# Altium PCB GT_4SBalancer.PcbDoc
Units mm, origin at the board's own origin, x right, y up, seen from the top; angles counter-clockwise.
Board outline 65.15 x 30.1 mm, 2 copper layers (Top Layer, Bottom Layer); 31 components, 25 nets, 99 pads, 31 vias.
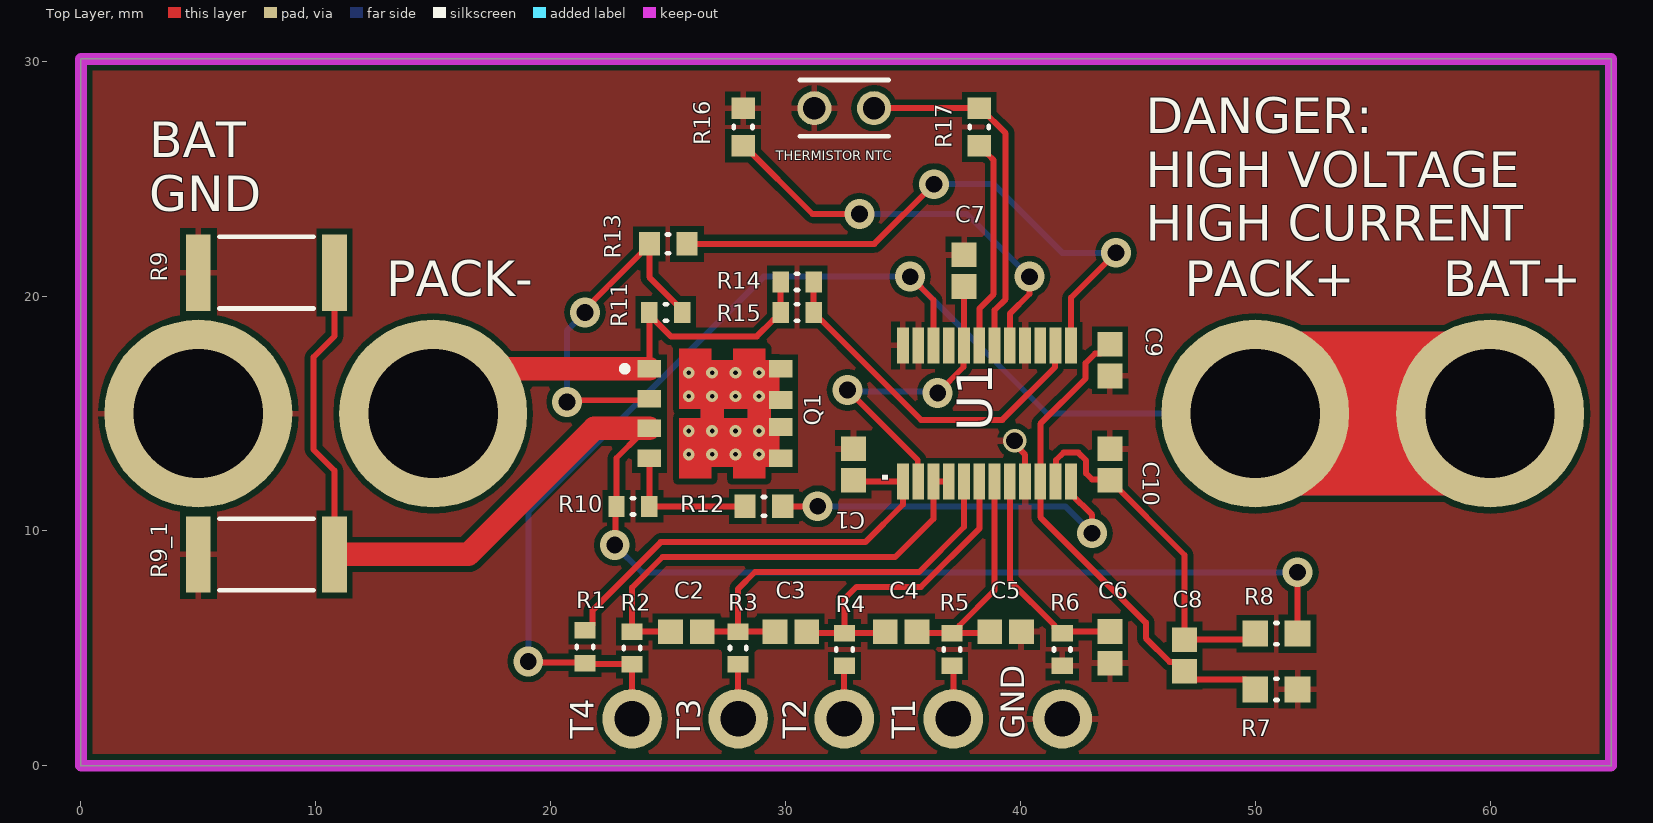
[diagram p0: Top Layer view]
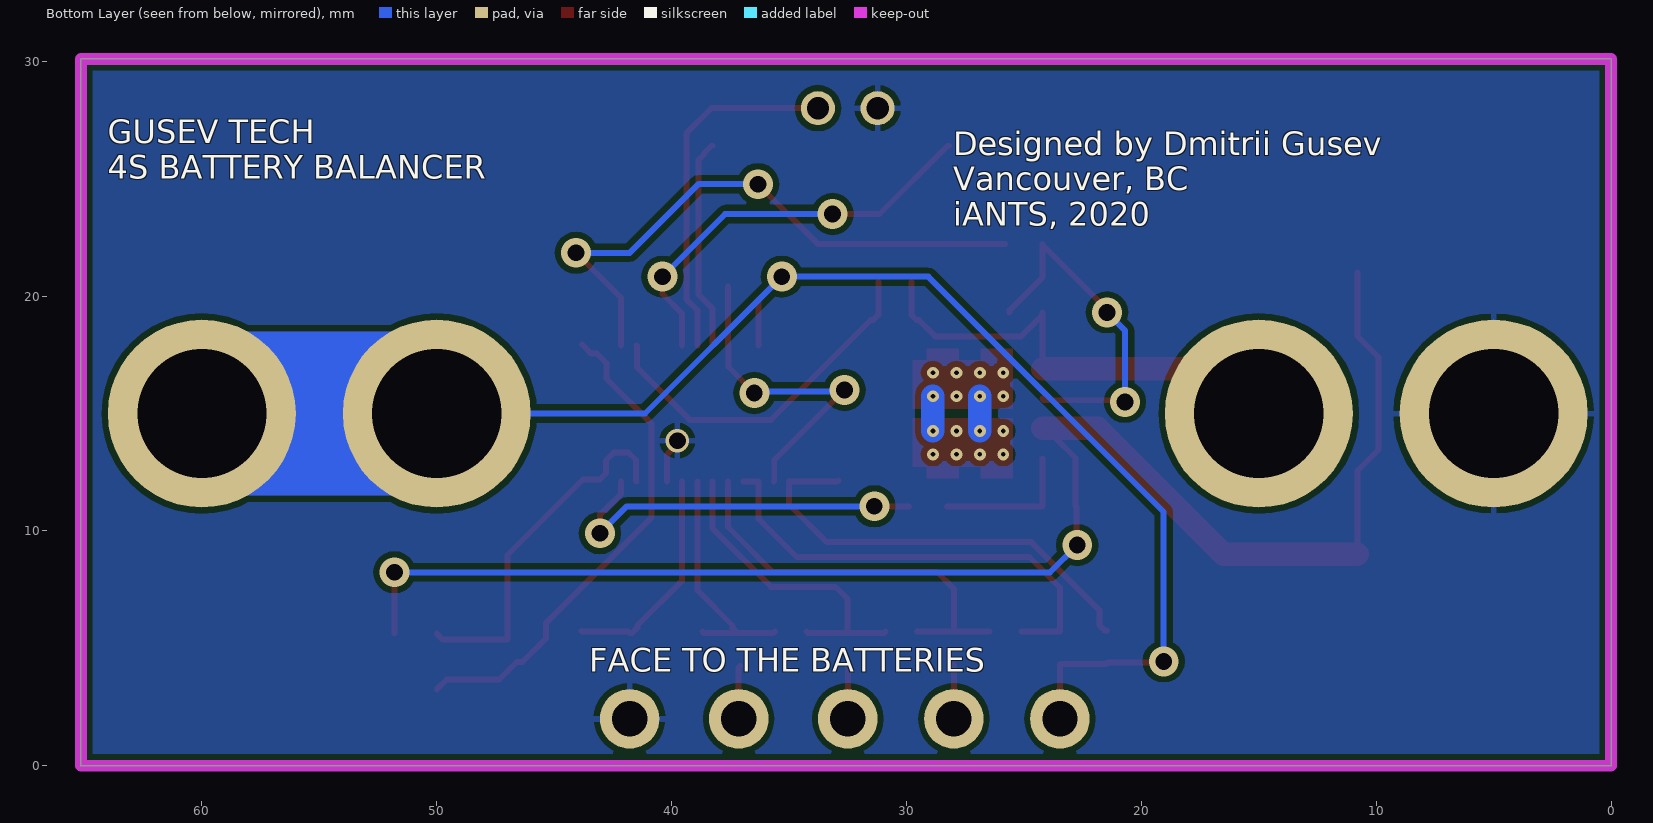
[diagram p1: Bottom Layer view, seen from below]

## Layer stack, top to bottom
Top Solder: solder mask 0.0102, Solder Resist, Dk 3.5
Top Layer: signal copper 0.0356
Dielectric 1: dielectric 0.32, FR-4, Dk 4.8
Bottom Layer: signal copper 0.0356
Bottom Solder: solder mask 0.0102, Solder Resist, Dk 3.5

## Board outline
0,0 65.151,0 65.151,30.099 0,30.099

## Design rules (kind name [scope] priority, off if disabled: settings)
Clearance [All] p1: gap=0.254 ignorepadtopadclearanceinfootprint=FALSE except(0: Arc-Hole Track-Hole SMDPad-Hole THPad-Hole Via-Hole Fill-Hole Poly-Hole Region-Hole Text-Hole)
PolygonConnect [All] p1: connectstyle=Relief reliefconductorwidth=0.254 reliefentries=4 polygonreliefangle="90 Angle" airgapwidth=0.254
RoutingVias [All] p1: holewidth=0.711 width=1.27 viastyle="Through Hole" minholewidth=0.711 minwidth=1.27 maxholewidth=0.711 maxwidth=1.27
SolderMaskExpansion [All] p1: expansion=0.102
Width [All] p1: maxlimit=0.254 minlimit=0.254 preferedwidth=0.254
30 further rules are at their usual default settings.

## Components (designator, comment, footprint, x,y, rotation, side; value= is the part's Value field where it differs from the comment)
C1 "UMK107BJ105KA-T" CAPC1608X90X35ML10T25 32.893,12.827 r270 top
C2 "CC0603KRX7R7BB104" CAPC1608X90X40ML10T20 25.781,5.715 r180 top
C3 "CC0603KRX7R7BB104" CAPC1608X90X40ML10T20 30.226,5.715 r180 top
C4 "CC0603KRX7R7BB104" CAPC1608X90X40ML10T20 34.925,5.715 r180 top
C5 "CC0603KRX7R7BB104" CAPC1608X90X40ML10T20 39.37,5.715 r180 top
C6 "CC0603KRX7R7BB104" CAPC1608X90X40ML10T20 43.815,5.043 r270 top
C7 "UMK107BJ105KA-T" CAPC1608X90X35ML10T25 37.6,21.082 r270 top
C8 "CC0603KRX7R7BB104" CAPC1608X90X40ML10T20 46.99,4.699 r270 top
C9 "CC0603KRX7R7BB104" CAPC1608X90X40ML10T20 43.815,17.272 r90 top
C10 "CC0603KRX7R7BB104" CAPC1608X90X40ML10T20 43.815,12.827 r270 top
Q1 "NVMFD5489NLWFT3G" ONSC-DFN-8-506BT_V 27,15 r0 top
R1 "1K 5% 0603(1608)" RESC0603(1608)_L 21.463,5.068 r90 top value="1000.00 Ohm"
R2 "1K 5% 0603(1608)" RESC0603(1608)_L 23.468,5.018 r90 top value="1000.00 Ohm"
R3 "1K 5% 0603(1608)" RESC0603(1608)_L 27.984,5.018 r90 top value="1000.00 Ohm"
R4 "1K 5% 0603(1608)" RESC0603(1608)_L 32.512,4.953 r90 top value="1000.00 Ohm"
R5 "1K 5% 0603(1608)" RESC0603(1608)_L 37.084,4.953 r90 top value="1000.00 Ohm"
R6 "1K 5% 0603(1608)" RESC0603(1608)_L 41.783,4.953 r90 top value="1000.00 Ohm"
R7 "100R 1% 0603(1608)" RESC0603(1608)_M 50.9,3.255 r180 top value="100.00 Ohm"
R8 "100R 1% 0603(1608)" RESC0603(1608)_M 50.9,5.628 r180 top value="100.00 Ohm"
R9 "R008 1% 2512(6432)" RESC2512(6432)_L 7.9,21 r0 top value="30100.00 Ohm"
R9_1 "R008 1% 2512(6432)" RESC2512(6432)_L 7.9,9 r0 top value="30100.00 Ohm"
R10 "1M 1% 0603(1608)" RESC0603(1608)_L 23.505,11.049 r0 top value="1000000.00 Ohm"
R11 "1M 1% 0603(1608)" RESC0603(1608)_L 24.905,19.304 r0 top value="1000000.00 Ohm"
R12 "10K 1% 0603(1608)" RESC0603(1608)_N 29.083,11.049 r0 top value="10000.00 Ohm"
R13 "10K 1% 0603(1608)" RESC0603(1608)_N 25.005,22.225 r0 top value="10000.00 Ohm"
R14 "1M 1% 0603(1608)" RESC0603(1608)_L 30.495,20.607 r0 top value="1000000.00 Ohm"
R15 "1M 1% 0603(1608)" RESC0603(1608)_L 30.495,19.304 r0 top value="1000000.00 Ohm"
R16 "100K 1% 0603(1608)" RESC0603(1608)_N 28.194,27.2 r90 top value="100000.00 Ohm"
R17 "10K 1% 0603(1608)" RESC0603(1608)_N 38.25,27.2 r270 top value="10000.00 Ohm"
"THERMISTOR NTC" "103AT-2" SEMI-103AT-2_V 32.5,28 r0 top
U1 "BQ77915" BQ77915 35,15 r90 top

## Footprints (in the part's own frame and the unit in brackets; to place one, negate y for a bottom-side part, rotate by r counter-clockwise, add the part's x,y. Pads: shape width x height; smd on the part's side, far side on the other; paste and mask are expansions set on the pad)
BQ77915 [mm] "TSSOP-24"
  rect 1.524x0.5 smd: 1(-2.9,0) 2(-2.9,-0.65) 3(-2.9,-1.3) 4(-2.9,-1.95) 5(-2.9,-2.6) 6(-2.9,-3.25) 7(-2.9,-3.9) 8(-2.9,-4.55) 9(-2.9,-5.2) 10(-2.9,-5.85) 11(-2.9,-6.5) 12(-2.9,-7.15) 13(2.9,-7.15) 14(2.9,-6.5) 15(2.9,-5.85) 16(2.9,-5.2) 17(2.9,-4.55) 18(2.9,-3.9) 19(2.9,-3.25) 20(2.9,-2.6) 21(2.9,-1.95) 22(2.9,-1.3) 23(2.9,-0.65) 24(2.9,0)
  body extent -3.21,-7.41 3.22,0.29, height 1.11
CAPC1608X90X35ML10T25 [mm] "Chip Capacitor, 2-Leads, Body 1.70x0.90mm, IPC Low Density"
  rect 1.05x1.05 smd: 1(-0.675,0) 2(0.675,0)
  body extent -0.85,-0.45 0.85,0.45, height 0.9
CAPC1608X90X40ML10T20 [mm] "Chip Capacitor, 2-Leads, Body 1.7x0.9mm, IPC Low Density"
  rect 1.05x1.05 smd: 1(-0.675,0) 2(0.675,0)
  body extent -0.85,-0.45 0.85,0.45, height 0.9
ONSC-DFN-8-506BT_V [mm] "DFN, 8-Leads, Body 5.9x4.9mm, Pitch 1.27mm"
  rect 1x0.75 smd: 1(-2.795,1.905) 2(-2.795,0.635) 3(-2.795,-0.635) 4(-2.795,-1.905) 5(2.795,-1.905) 6(2.795,-0.575) 7(2.795,0.575) 8(2.795,1.905)
  Top Layer region: -1.545,-0.2 -1.545,-2.28 2.735,-2.28 2.735,-0.2
  Top Layer region: 0.755,-0.2 0.755,-2.775 2.155,-2.775 2.155,-0.2
  Top Layer region: -1.545,-0.2 -1.545,-2.775 -0.145,-2.775 -0.145,-0.2
  Top Layer region: -0.145,0.2 -0.145,2.775 -1.545,2.775 -1.545,0.2
  Top Layer region: 2.155,0.2 2.155,2.775 0.755,2.775 0.755,0.2
  Top Layer region: 2.735,0.2 2.735,2.28 -1.545,2.28 -1.545,0.2
  silkscreen extent -3.97,1.78 -3.72,2.03, body extent -2.95,-2.45 2.95,2.45, height 1.1
RESC0603(1608)_L [mm] "Chip Resistor, Body 1.6x0.8mm, IPC High Density"
  rect 0.7x0.9 smd: 1(-0.7,0) 2(0.7,0)
  silkscreen extent -0.05,-0.35 0.05,0.35, body extent -0.85,-0.47 0.85,0.47, height 0.6
RESC0603(1608)_M [mm] "Chip Resistor, Body 1.6x0.8mm, IPC Low Density"
  rect 1.1x1.1 smd: 1(-0.9,0) 2(0.9,0)
  silkscreen extent -0.05,-0.45 0.05,0.45, body extent -0.85,-0.47 0.85,0.47, height 0.6
RESC0603(1608)_N [mm] "Chip Resistor, Body 1.6x0.8mm, IPC Medium Density"
  rect 0.9x1 smd: 1(-0.8,0) 2(0.8,0)
  silkscreen extent -0.05,-0.4 0.05,0.4, body extent -0.85,-0.47 0.85,0.47, height 0.6
RESC2512(6432)_L [mm] "Chip Resistor, Body 6.4x3.2mm, IPC High Density"
  rect 1.05x3.25 smd: 1(-2.9,0) 2(2.9,0)
  silkscreen extent -2,-1.52 2,1.53, body extent -3.25,-1.7 3.25,1.7, height 0.75
SEMI-103AT-2_V [mm] "THD, 2-Leads, Body Width 3.8mm (Max), Pitch 2.54mm"
  round 1.45 hole 0.95: 1(-1.27,0) 2(1.27,0)
  silkscreen extent -1.9,-1.2 1.9,1.2, body extent -1.9,-1.2 1.9,1.2, height 9.5

## Part data
C1 C7: library part CMP-2000-05447-1, "Chip Capacitor, 1 uF, +/- 10%, 50 V, -55 to 85 degC, 0603 (1608 Metric), RoHS, Tape and Reel", Capacitance=1µF, Manufacturer="Taiyo Yuden", Operating Temperature=-55degC~85degC, Package / Case=0603(1608Metric), Package Description="2-Pin Surface Mount Device, Body 1.6 x 0.8 mm", Package Reference=603, Ratings=-, Standard Package=1, Temperature Coefficient=X5R, Tolerance=±10%, Voltage - Rated=50V, Applications=GeneralPurpose, Catalog Drawings=xMKSeries_0603_0.8, Category=Capacitors, Datasheet URL=https://datasheet.ciiva.com/15922/336umk107bj105ka-t-15922611.pdf, Datasheet Version=Mar-13, Family=CeramicCapacitors, Features=-, Height - Seated (Max)=-, Lead Spacing=-, Lead Style=-, Manufacturer URL=http://www.t-yuden.com/, Mounting Type=SurfaceMount,MLCC, Online Catalog=MSeries, Other Names=587-2400-6, Packaging=Digi-Reel, Series=M
C2 C3 C4 C5 C6 C8 C9 C10: library part CMP-2000-05002-1, "Ceramic Multilayer Capacitor, 100 nF, +/- 10%, 50 V, -55 to 155 degC, 0603 (1608 Metric), RoHS, Tape and Reel", Capacitance=0.1µF, Manufacturer=Yageo, Operating Temperature=-55degC~125degC, Package / Case=0603(1608Metric), Package Description="2-Pin Surface Mount Device, Body 1.6 x 0.8 mm", Package Reference=603, Ratings=-, Standard Package=1, Temperature Coefficient=X7R, Tolerance=±10%, Voltage - Rated=16V, Applications=GeneralPurpose, Category=Capacitors, Datasheet URL=https://datasheet.ciiva.com/11786/0900766b80d84f1d-11786077.pdf, Datasheet Version="Rev. 2, 05/2009", Family=CeramicCapacitors, Featured Product=CommodityMultilayerCeramicCapacitors–CCSeries, Features=-, Height - Seated (Max)=-, Lead Spacing=-, Lead Style=-, Manufacturer URL=http://www.yageo.com/, Mounting Type=SurfaceMount,MLCC, Online Catalog=CCSeries, Other Names=311-1088-6, Packaging=Digi-Reel, Product Training Modules=MultilayerCeramicCapacitors, Series=CC
Q1: library part CMP-1058-00276-1, "Power MOSFET, 60 V, 12 A, 65 mOhm, Dual N-Channel Logic Level, 8-Pin DFN, Pb-Free, Tape and Reel", Manufacturer="On Semiconductor", Package Type=DFN-8, Channel Polarity="N Channel", Ciss Typ (pF)=330, ComponentLink1Description="Manufacturer URL", ComponentLink1URL=http://www.onsemi.com/, ComponentLink2Description=Datasheet, ComponentLink2URL=http://www.onsemi.com/pub_link/Collateral/NVMFD5489NL-D.PDF, ComponentLink3Description="Package Specification", ComponentLink3URL=http://www.onsemi.com/pub_link/Collateral/506BT.PDF, Configuration=Dual, Coss Typ (pF)=80, Crss Typ (pF)=39, DatasheetVersion="Rev. 1", ID Max (A)=12, Mounting Technology="Surface Mount", PackageDescription="8-Pin Small Outline No-Lead, Body 4.9 x 5.9 mm, Pitch 1.27 mm", PackageReference=DFN-8-506BT, PackageVersion="Rev. E, 02/2013", Packing="Tape and Reel", PartId=1, PartNumber=NVMFD5489NLWFT3G, Qrr Typ (nC)=26.5, RoHS=Pb-Free, V(BR)DSS Min (V)=60, VGS(th) Max (V)=2.5, VGS Max (V)=20
R1 R2 R3 R4 R5 R6: library part CMP-1012-00074-1, "1K 0.1W 5% 0603 (1608 Metric)  SMD", Case-EIA=0603, Case-Metric=1608, Power="0.1 W", Tolerance="5 %", Technology=SMT
R7 R8: library part CMP-1012-00397-1, "100R 0.1W 1% 0603 (1608 Metric)  SMD", Case-EIA=0603, Case-Metric=1608, Power="0.1 W", Tolerance="1 %", Technology=SMT
R9 R9_1: library part CMP-1018-00676-1, "30K1 1W 1% 2512 (6432 Metric)  SMD", Case-EIA=2512, Case-Metric=6432, Power="1 W", Tolerance="1 %", Technology=SMT
R10 R11 R14 R15: library part CMP-1012-00849-1, "1M 0.1W 1% 0603 (1608 Metric)  SMD", Case-EIA=0603, Case-Metric=1608, Power="0.1 W", Tolerance="1 %", Technology=SMT
R12 R13 R17: library part CMP-1012-00623-1, "10K 0.1W 1% 0603 (1608 Metric)  SMD", Case-EIA=0603, Case-Metric=1608, Power="0.1 W", Tolerance="1 %", Technology=SMT
R16: library part CMP-1012-00736-1, "100K 0.1W 1% 0603 (1608 Metric)  SMD", Case-EIA=0603, Case-Metric=1608, Power="0.1 W", Tolerance="1 %", Technology=SMT
"THERMISTOR NTC": library part CMP-2000-05824-1, "Precision NTC Thermistor, 10 kOhm, +/- 1%, 10 mW, -50 to 110 degC, 2-Pin THD, RoHS, Bulk", Manufacturer=Semitec, Operating Temperature Range=-50Cto+110C, Package Description="2-Pin Through Hole Device, Body Width 3.8 mm (Max), Pitch 2.54 mm", Resistance=10kOhms, Tolerance=1%, Brand=Semitec, Datasheet URL=https://www.rapidonline.com/pdf/61-0500e.pdf, Datasheet Version="Rev. A, 02/2007", Height=2.4mm, Lead Spacing=2.54mm, Length=17mm, Manufacturer URL=http://www.semitec.co.jp/english/, Mounting Technology=ThroughHole, Package Reference=103AT-2, Packaging=Bulk, Product Category=Thermistors-NTC, RoHS=True, Series=AT, Termination Style=Radial, Type=NTC, Width=3.7mm

## Free pads (board coordinates)
  round 8 hole 5.5: 14(5,15) 14(15,15) 14(50,15) 14(60,15)
  round 2.54 hole 1.5: 15(23.468,2) 15(27.984,2) 15(32.5,2) 15(37.143,2) 15(41.786,2)

## Via types
v1: diameter 0.5, hole 0.2, Top Layer to Bottom Layer, 16 vias
v2: diameter 1.27, hole 0.711, Top Layer to Bottom Layer, 14 vias
v3: diameter 1, hole 0.711, Top Layer to Bottom Layer, 1 vias

## Nets (pads, with @x,y where several pads share a name; then routed paths per layer and width w, separated by ;. In a path a pad name is that pad's centre, name@x,y a point inside that pad or via, vN(x,y) a via of type N, cw(c..) or ccw(c..) an arc to the next point about the centre after c; other vN are vias at no path point)
GND: "THERMISTOR NTC.1" C1.1 C5.1 C6.2 C7.1 C9.1 C10.1 pad.14@5,15 pad.15@41.786,2 R6.1 R7.1 R9.1 R9_1.1 R16.2 U1.9 U1.16 U1.23 U1.24 | length 1.9
  Top Layer w0.254: v3(39.751,13.843) 39.751,13.692 40.2,13.243 U1.9
NetC1_2: C1.2 R1.2 U1.1 | length 19.2
  Top Layer w0.254: R1.2 21.563,5.768 21.786,5.991 21.786,6.629 24.682,9.525 33.401,9.525 35,11.124 U1.1 32.945,12.1 C1.2
NetC2_1: C2.1 C3.2 R3.2 U1.5 | length 17.6
  Top Layer w0.254: C2.1 26.459,5.718 R3.2 ; C3.2 29.548,5.718 R3.2 ; U1.5 37.6,10.168 35.687,8.255 28.702,8.255 27.984,7.537 R3.2
NetC2_2: C2.2 R2.2 U1.3 U1.4 | length 19.8
  Top Layer w0.254: C2.2 25.103,5.718 R2.2 23.468,7.593 24.765,8.89 34.671,8.89 36.3,10.519 U1.3 U1.4
NetC3_1: C3.1 C4.2 R4.2 U1.6 | length 13.8
  Top Layer w0.254: C3.1 30.963,5.653 R4.2 ; C4.2 34.188,5.653 R4.2 ; U1.6 38.25,10.1 35.77,7.62 33.02,7.62 32.512,7.112 R4.2
NetC4_1: C4.1 C5.2 R5.2 U1.7 | length 10.3
  Top Layer w0.254: C4.1 35.662,5.653 R5.2 R5.2@37.184,5.653 ; C5.2 38.633,5.653 R5.2@37.184,5.653 ; U1.7 38.9,7.469 37.407,5.976 37.407,5.876 R5.2@37.184,5.653
NetC6_1: C6.1 R6.2 U1.8 | length 9.5
  Top Layer w0.254: U1.8 39.55,7.886 41.46,5.976 41.46,5.876 41.683,5.653 R6.2 41.848,5.718 C6.1 C6.1@43.84,5.743
NetC7_2: C7.2 U1.2 U1.20 | length 14
  Top Layer w0.254: v2(32.639,16.002) 32.649,16.002 35.631,13.02 35.631,12.119 U1.2 ; v2(36.476,15.875) 37.581,16.98 37.581,17.881 U1.20 C7.2
  Bottom Layer w0.254: v2(32.639,16.002) 32.703,15.938 36.412,15.938 v2(36.476,15.875)
NetC8_1: C8.1 C10.2 R8.2 U1.11 | length 15.4
  Top Layer w0.254: U1.11 41.519,12.119 41.519,13.02 41.834,13.335 42.466,13.335 42.799,13.002 42.799,12.446 43.053,12.192 43.775,12.192 C10.2 46.99,8.977 C8.1 49.746,5.374 R8.2
NetC8_2: C8.2 C9.2 R7.2 U1.10 | length 21.3
  Top Layer w0.254: C9.2 43.417,17.549 43.178,17.549 42.781,17.152 42.781,16.492 40.85,14.561 U1.10 40.85,10.585 45.339,6.096 45.339,5.436 46.353,4.422 46.592,4.422 C8.2 47.336,3.678 49.577,3.678 R7.2
NetQ1_1: pad.14@15,15 Q1.1 R11.1 R14.1 R15.1 | length 20.1
  Top Layer w0.254: Q1.1 R11.1@24.205,19.204 ; R11.1 R11.1@24.205,19.204 ; R14.1 R15.1 29.795,19.204 29.572,18.981 29.472,18.981 28.779,18.288 25.121,18.288 R11.1@24.205,19.204
  Top Layer w1: pad.14@15,15 16.905,16.905 Q1.1
NetQ1_2: Q1.2 R11.2 R13.1 | length 15.2
  Top Layer w0.254: v2(20.701,15.494) 20.772,15.565 24.134,15.565 Q1.2 ; v2(21.463,19.304) 21.463,19.433 R13.1@24.205,22.175 ; R13.1 R13.1@24.205,22.175 ; R11.2 25.605,19.404 24.205,20.804 R13.1@24.205,22.175
  Bottom Layer w0.254: v2(20.701,15.494) 20.701,18.542 v2(21.463,19.304)
NetQ1_3: Q1.3 R8.1 R9.2 R9_1.2 R10.1 | length 66.2
  Top Layer w0.254: R9_1.2 10.8,12.568 9.906,13.462 9.906,17.399 10.8,18.293 R9.2 ; v2(22.733,9.398) 22.769,9.434 22.769,11.013 R10.1 22.805,13.109 23.813,14.117 23.957,14.117 Q1.3 ; R8.1 v2(51.8,8.239) v2@51.816,8.255
  Top Layer w1: R9_1.2 16.493,9 21.858,14.365 Q1.3
  Bottom Layer w0.254: v2(22.733,9.398) 23.892,8.239 v2(51.8,8.239)
NetQ1_4: Q1.4 R10.2 R12.1 | length 6.1
  Top Layer w0.254: Q1.4 R10.2 R12.1
NetQ1_5: Q1.5 Q1.6 Q1.7 Q1.8 | length 6
  Top Layer w0.254: v1(25.875,15.74) 25.9,15.74 v1@25.908,15.748
  Top Layer w1: v1(26.875,14.26) v1(26.875,15.74) ; v1(28.875,14.26) v1(28.875,15.74)
  Bottom Layer w1: v1(26.875,14.26) v1(26.875,15.74) ; v1(28.875,14.26) v1(28.875,15.74)
  other v1: 25.875,13.26 26.875,13.26 27.875,13.26 28.875,13.26 25.875,14.26 27.875,14.26 27.875,15.74 25.875,16.74 26.875,16.74 27.875,16.74 28.875,16.74
NetR1_1: pad.14@50,15 pad.14@60,15 pad.15@23.468,2 R1.1 R2.1 U1.22 | length 74
  Top Layer w0.254: v2(19.05,4.445) 19.088,4.407 21.424,4.407 R1.1 21.488,4.343 23.443,4.343 R2.1 pad.15@23.468,2 ; v2(35.306,20.828) 36.3,19.834 U1.22
  Top Layer w7: pad.14@50,15 pad.14@60,15
  Bottom Layer w0.254: v2(19.05,4.445) 19.05,10.807 29.071,20.828 v2(35.306,20.828) 41.134,15 pad.14@50,15
  Bottom Layer w7: pad.14@50,15 pad.14@60,15
NetR3_1: pad.15@27.984,2 R3.1 | length 2.3
  Top Layer w0.254: pad.15@27.984,2 R3.1
NetR4_1: pad.15@32.5,2 R4.1 | length 2.3
  Top Layer w0.254: pad.15@32.5,2 32.5,4.241 R4.1
NetR5_1: pad.15@37.143,2 R5.1 | length 2.3
  Top Layer w0.254: R5.1 37.143,4.194 pad.15@37.143,2
NetR12_2: R12.2 U1.12 | length 16.2
  Top Layer w0.254: R12.2 v2(31.369,11.049) ; U1.12 42.15,11.588 43.053,10.685 v2(43.053,9.906)
  Bottom Layer w0.254: v2(31.369,11.049) 41.91,11.049 v2(43.053,9.906)
NetR13_2: R13.2 U1.13 | length 25.3
  Top Layer w0.254: R13.2 33.782,22.225 v2(36.322,24.765) ; U1.13 42.157,17.907 42.157,19.932 v2(44.069,21.844)
  Bottom Layer w0.254: v2(36.322,24.765) 38.862,24.765 41.783,21.844 v2(44.069,21.844)
NetR14_2: R14.2 R15.2 U1.14 | length 15.4
  Top Layer w0.254: R14.2 R15.2 31.195,19.204 31.418,18.981 31.518,18.981 35.767,14.732 39.233,14.732 41.481,16.98 41.481,17.881 U1.14
NetR16_1: R16.1 U1.17 | length 17.8
  Top Layer w0.254: R16.1 28.244,26.4 31.149,23.495 v2(33.147,23.495) ; U1.17 39.55,19.254 40.386,20.09 v2(40.386,20.828)
  Bottom Layer w0.254: v2(33.147,23.495) 37.719,23.495 v2(40.386,20.828)
NetR17_1: "THERMISTOR NTC.2" R17.1 U1.18 | length 15.3
  Top Layer w0.254: 33.77,28 R17.1 38.3,28 39.37,26.93 39.37,19.87 38.9,19.4 U1.18
NetR17_2: R17.2 U1.19 | length 9
  Top Layer w0.254: U1.19 38.25,19.468 38.862,20.08 38.862,25.788 38.623,26.027 38.623,26.077 38.3,26.4 R17.2
pads on no net: U1.15 U1.21

## Polygon pours and split planes (outlines as drawn)
GND on Top Layer "GND_top" (solid, pour order 2): 0,30.099 65.151,30.099 65.151,0 0,0
GND on Bottom Layer "GND_bottom" (solid, pour order 0): 0,30.099 65.151,30.099 65.151,0 0,0

## Keep-outs
Keep-Out Layer:
  the board outline again, w0.5

## Silkscreen, mask and mechanical layers (free items; w line width, h text height)
Top Overlay:
  text "BAT  / GND" at 2.921,23.622 h1.52
  text "DANGER:  / HIGH VOLTAGE / HIGH CURRENT" at 45.339,22.352 h1.52
  text "PACK-" at 13,20 h1.52
  text "PACK+" at 47,20 h1.52
  text "BAT+" at 58,20 h1.52
  text "T4" at 21.844,1.143 h1 r90
  text "T3" at 26.36,1.143 h1 r90
  text "T2" at 30.876,1.143 h1 r90
  text "T1" at 35.519,1.143 h1 r90
  text "GND" at 40.162,1.143 h1 r90
Bottom Overlay:
  text "GUSEV TECH  / 4S BATTERY BALANCER" at 64,25 h1
  text "Designed by Dmitrii Gusev  / Vancouver, BC / iANTS, 2020" at 28,23 h1
  text "FACE TO THE BATTERIES" at 43.5,4 h1